# Altium PCB 主板.pcbdoc
Units mil, origin at the board's own origin, x right, y up, seen from the top; angles counter-clockwise.
Board outline 5658.5 x 2535.72 mil, 2 copper layers (Top Layer, Bottom Layer); 63 components, 57 nets, 290 pads, 118 vias.
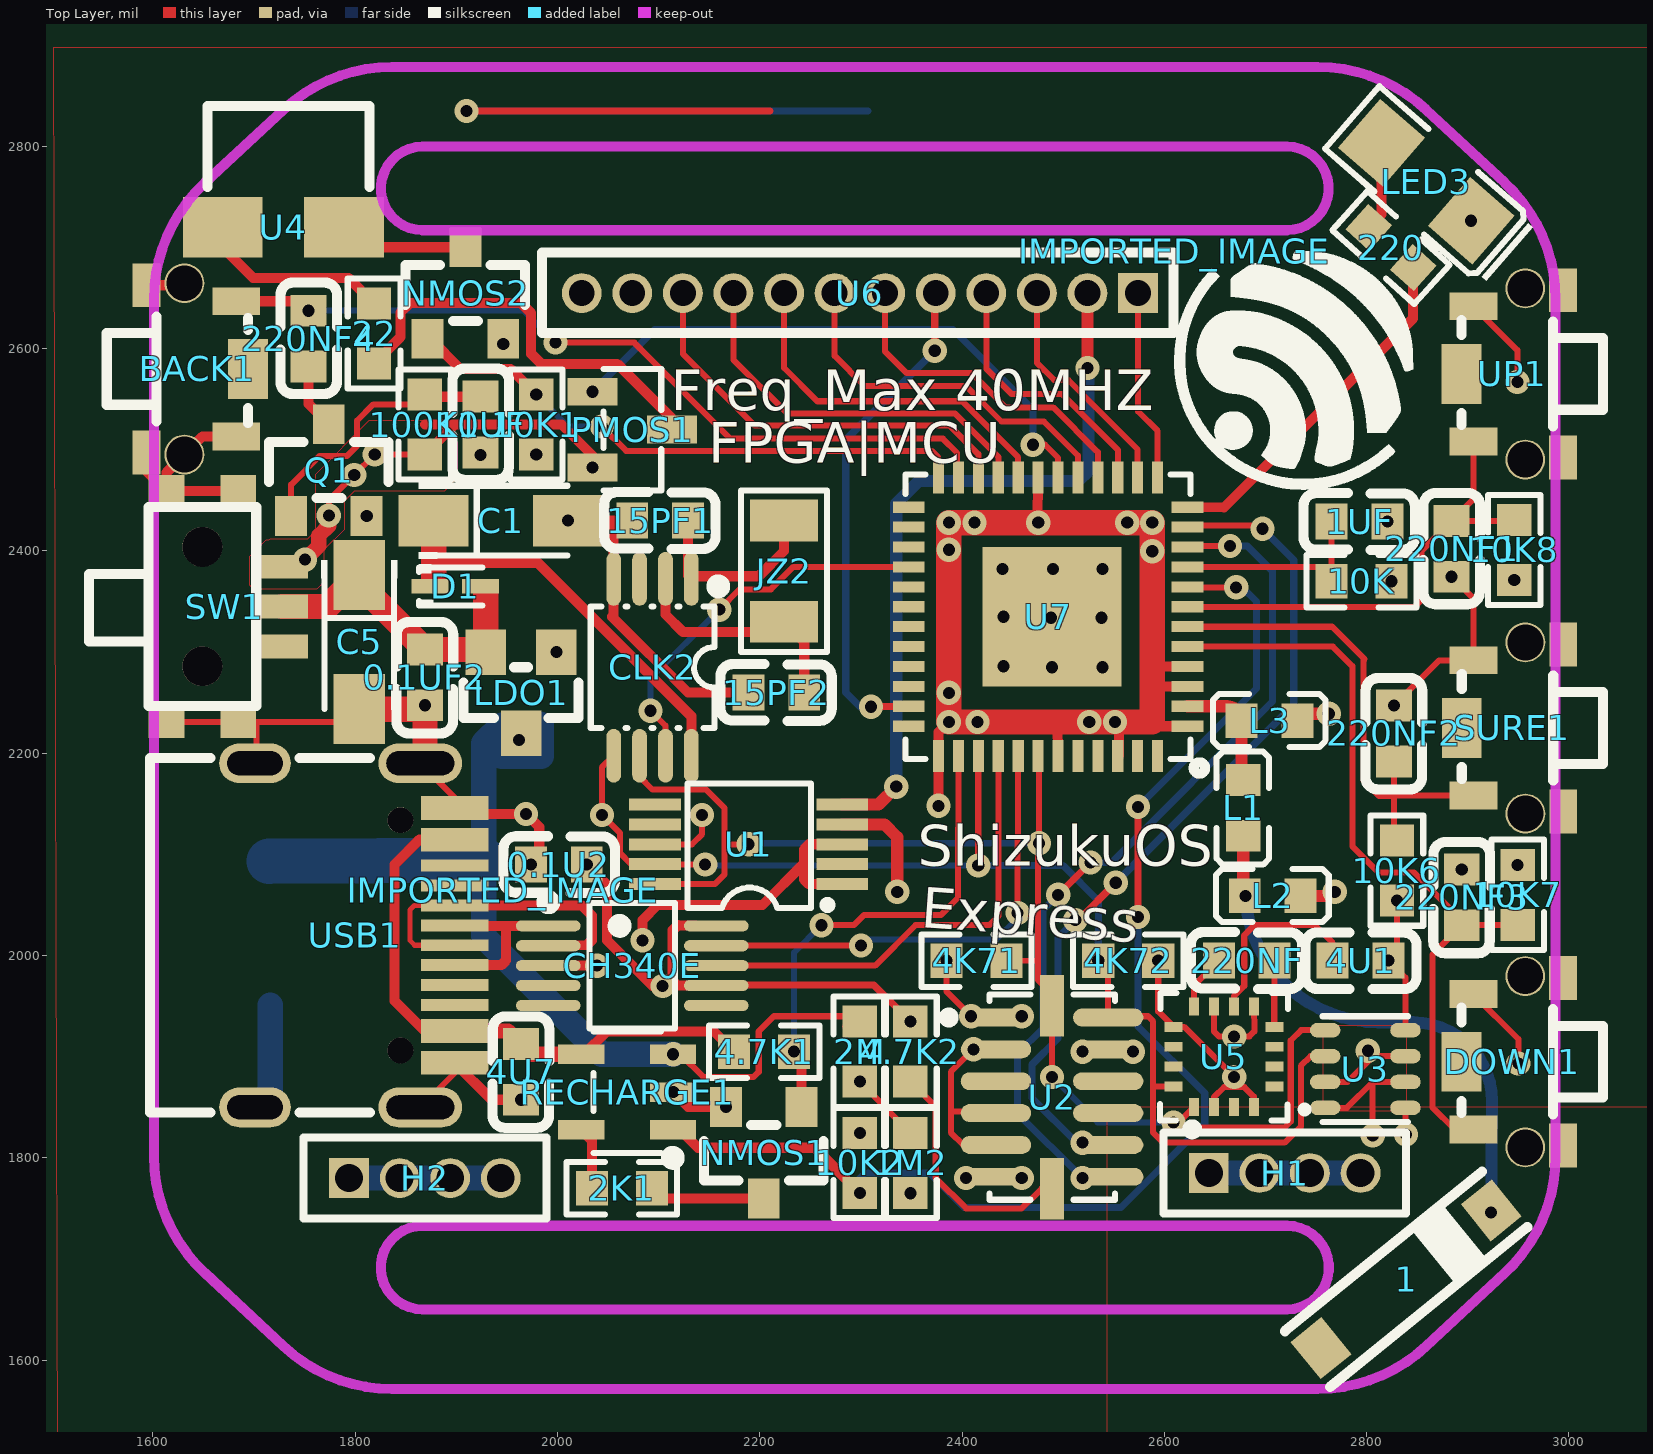
[diagram p0: Top Layer view]
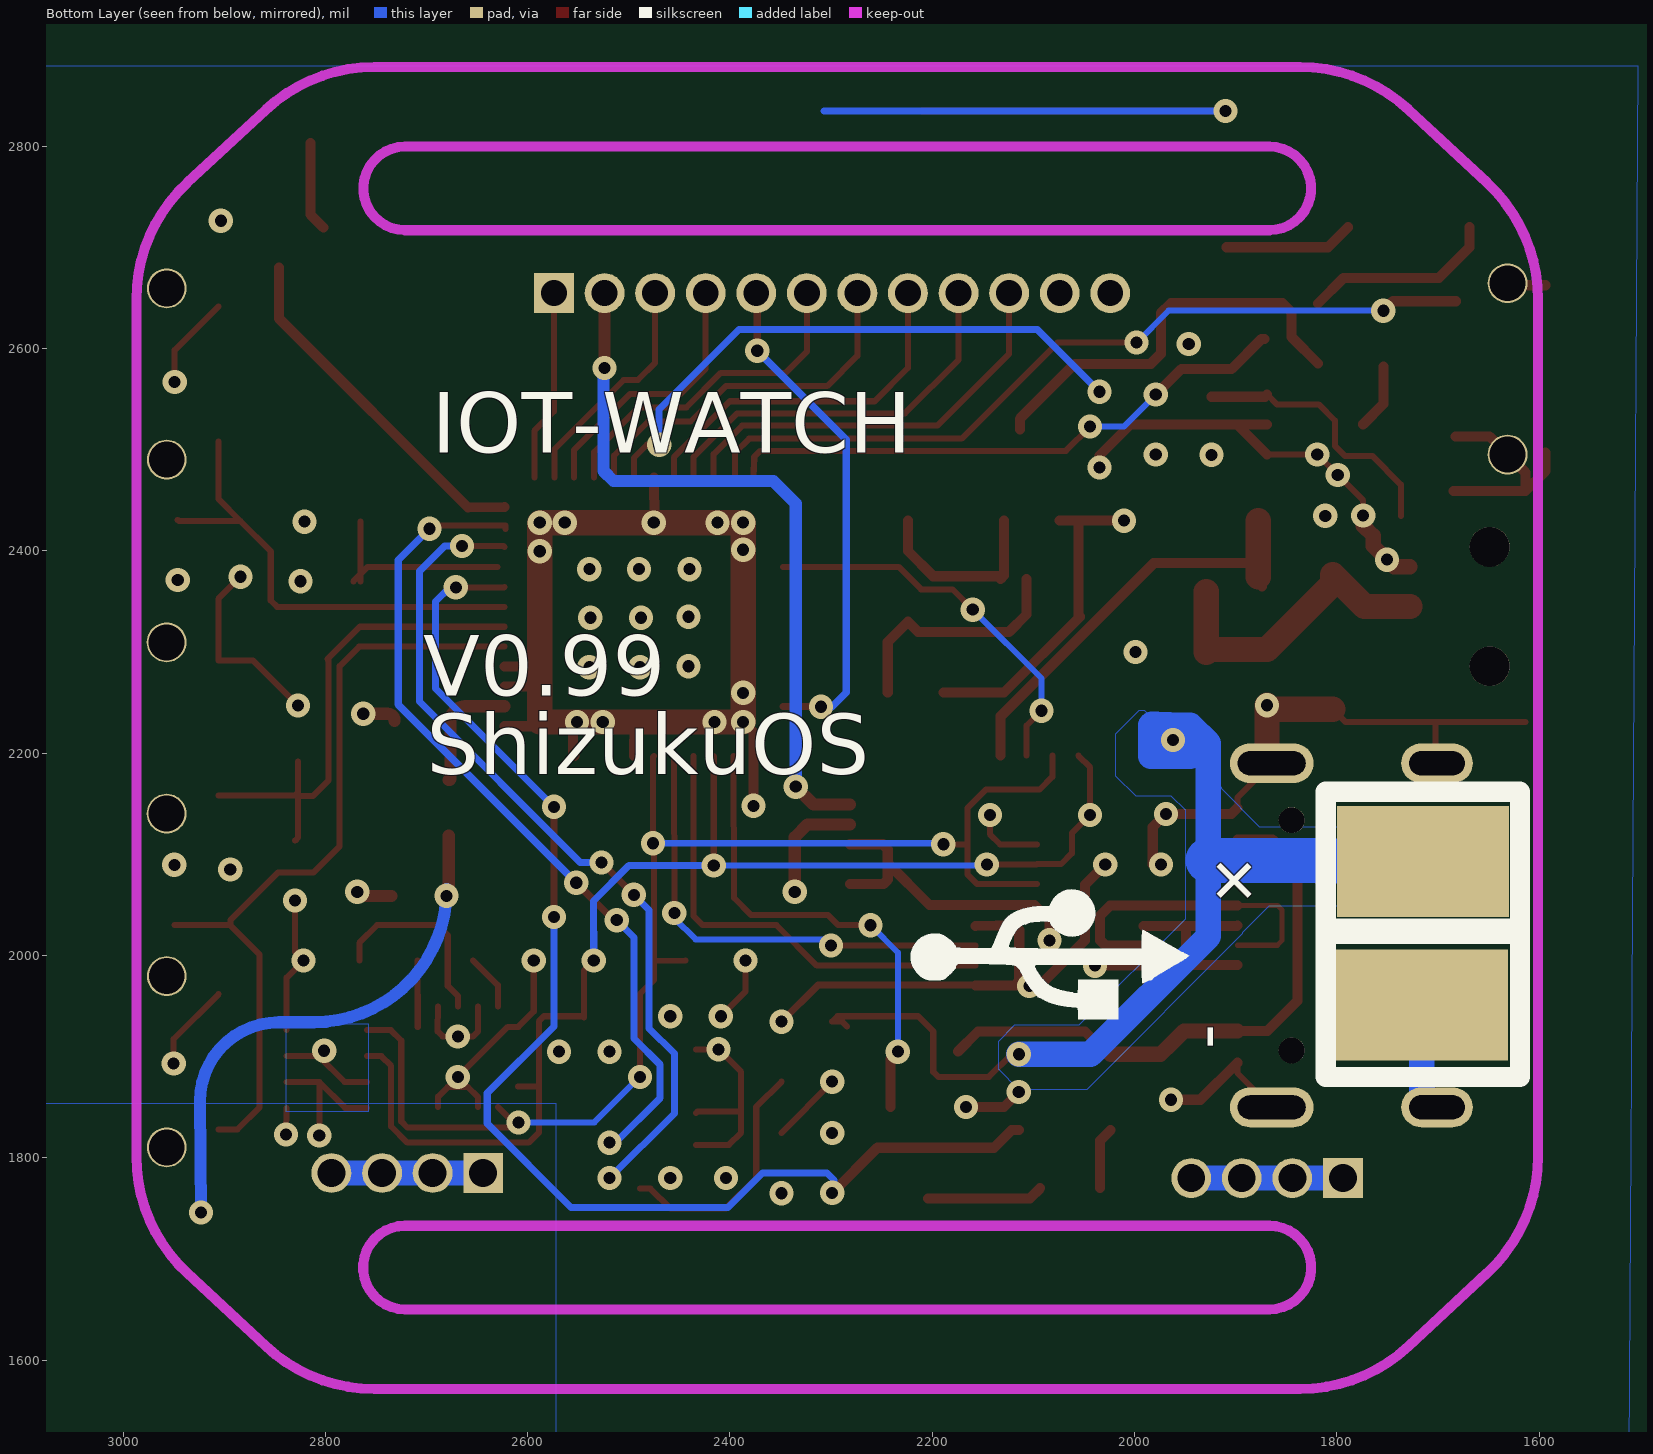
[diagram p1: Bottom Layer view, seen from below]

## Layer stack, top to bottom
Top Layer: signal copper (thickness not stored)
Dielectric: dielectric 12.6, FR-4, Dk 4.8
Bottom Layer: signal copper (thickness not stored)

## Board outline
6658.5,1000 1000,1000 1000,3535.72 6658.5,3535.72

## Components (designator, comment, footprint, x,y, rotation, side; value= is the part's Value field where it differs from the comment)
0.1U2 "0.1u" C0603 2001.45,2090 r180 top
0.1UF2 "0.1u" C0603 1869,2275 r90 top
1 "OA-C09" OA-C09 2839,1680 r219 top
1M2 "1M" R0603 2349,1795 r90 top
1UF "1uF" C0603 2793,2429 r0 top
2K1 "2k1" R0603 2063.65,1770 r0 top
2M "1M" R0603 2299,1905 r90 top
4.7K1 "4.7K" R0603 2204.34,1905 r0 top
4.7K2 "4.7K" R0603 2349,1905 r90 top
4K71 "4K71" R0603 2414.34,1995 r180 top
4K72 "4K72" R0603 2564.34,1995 r0 top
4U1 "0.1u" C0603 2794,1995 r180 top
4U7 "4.7uf" C0603 1964,1885 r90 top
10K "10kΩ" R0603 2795,2370 r0 top
10K1 "10K1" R0603 1979,2525 r90 top
10K2 "10K1" R0603 2299,1795 r90 top
10K6 "10K1" R0603 2830,2084 r270 top
10K7 "10K1" R0603 2949.34,2060 r90 top
10K8 "10K1" R0603 2946,2401 r270 top
10UF "0.1u" C0603 1924,2525 r270 top
15PF1 "15PF" C0603 2101.55,2430 r0 top
15PF2 "15PF2" C0603 2216.44,2260 r0 top
22 "1001" R0603 1818.66,2615 r90 top
100K1 "1k" R0603 1869,2525 r90 top
220 "10K2" R0603 2824,2700 r318 top
220NF "0.1u" C0603 2681.44,1995 r0 top
220NF1 "0.1u" C0603 2884,2402 r270 top
220NF2 "0.1u" C0603 2827,2219.55 r90 top
220NF3 "0.1u" C0603 2894,2057.55 r90 top
220NF4 "0.1u" C0603 1754,2610 r270 top
BACK1 "TS-1086EV-AR03526" SW-SMD_TS-1086EV-AR03526 1644,2580 r270 top
C1 "10uF" CAP-SMD_L3.2-W1.6-RD-C7171 1944,2430 r0 top
C5 "10uf1" CAP-SMD_L3.2-W1.6-RD-C7171 1804,2310 r270 top
CH340E "CH340E" MSOP-10_L3.0-W3.0-P0.50-LS5.0-BL 2074,1990 r270 top
CLK2 "PCF8563TS/5,118" TSSOP-8_L3.0-W3.0-P0.65-LS4.9-BL 2094,2285 r180 top
D1 "RB521S-30_C699098" SOD-523_L1.2-W0.8-LS1.6-RD 1899,2365 r0 top
DOWN1 "TS-1086EV-AR03526" SW-SMD_TS-1086EV-AR03526 2944,1895 r90 top
H1 "1.27mm1*4P" 1.27MM1*4P 2719,1785 r0 top
H2 "1.27mm1*4P" 1.27MM1*4P 1869,1780 r0 top
IMPORTED_IMAGE "IMPORTED_IMAGE" IMPORTED_IMAGE 1946.16,2064.79 r0 top
IMPORTED_IMAGE "IMPORTED_IMAGE" IMPORTED_IMAGE 2609.94,2696.36 r0 top
JZ2 "32.768K-SMD3215-2P" CRYSTAL-SMD_L3.2-W1.5-2 2224,2380 r90 top
L1 "1m" L0603 2678,2146 r90 top
L2 "1m" L0603 2707,2059 r0 top
L3 "1m" L0603 2704,2232 r0 top
LDO1 "XC6206P332MR-G" SEEED-SOT-23 1964,2260 r180 top
LED3 "25-21/T1D-AP2R1HY/2A" LED1206-R-RD 2859,2765 r139 top
NMOS1 "2N7002" SOT-23_L2.9-W1.3-P0.95-LS2.4-BR 2204,1805 r90 top
NMOS2 "2N7002" SOT-23_L2.9-W1.3-P0.95-LS2.4-BR 1909,2655 r270 top
PMOS1 "SI2305" SOT-23-3_L2.9-W1.3-P1.90-LS2.4-BR 2074,2520 r180 top
Q1 "2N7002" SOT-23_L2.9-W1.3-P0.95-LS2.4-BR 1773.96,2480 r270 top
RECHARGE1 "XT4054K421MR-G" SOT-23-5_L3.0-W1.7-P0.95-LS2.8-BL 2069,1865 r90 top
SURE1 "TS-1086EV-AR03526" SW-SMD_TS-1086EV-AR03526 2944.2,2224.99 r90 top
SW1 "MSK-12C00 COPY" MSK-12C00 1649,2345 r270 top
U1 "ADS1115BQDGSRQ1" VSSOP-10_L3.0-W3.0-P0.50-LS4.9-BL 2189,2110 r90 top
U2 "ADXL345BCCZ-RL7" LGA-14_L5.0-W3.0-P0.80-BL 2489,1860 r270 top
U3 "BMP280" SENSOR-TH_BMP280-BL 2798.7,1887.79 r0 top
U4 "rmt发射" RMT发射 1729,2720 r0 top
U5 "HMC5883L-TR" LGA-16_L3.0-W3.0-P0.50-BL_SQ 2659,1900 r0 top
U6 "1.27mm 12pin" "1.27MM 12P" 2299,2655 r180 top
U7 "ESP32-PICO-D4_REMAKE" "ESP32 PICOD4" 2485.07,2335 r90 top
UP1 "PinUP" SW-SMD_TS-1086EV-AR03526 2944,2575 r90 top
USB1 "TYPE-C16PIN REMAKE" USB-C-SMD_TYPE-C16PIN 1794,2020 r270 top

## Footprints (in the part's own frame and the unit in brackets; to place one, negate y for a bottom-side part, rotate by r counter-clockwise, add the part's x,y. Pads: shape width x height; smd on the part's side, far side on the other; paste and mask are expansions set on the pad)
1.27MM1*4P [mm]
  rect 1x1 hole 0.7: 1(-1.905,0)
  round 1 hole 0.7: 2(-0.635,0) 3(0.635,0) 4(1.905,0)
  silkscreen extent -3.05,-1.02 3.05,1.02
"1.27MM 12P" [mm]
  rect 1x1 hole 0.65: 1(-6.985,0)
  round 1 hole 0.65: 2(-5.715,0) 3(-4.445,0) 4(-3.175,0) 5(-1.905,0) 6(-0.635,0) 7(0.635,0) 8(1.905,0) 9(3.175,0) 10(4.445,0) 11(5.715,0) 12(6.985,0)
  silkscreen extent -7.87,-1.02 7.98,1
C0603 [mm]
  rect 0.8x0.9 smd: 1(-0.7,0) 2(0.7,0)
  silkscreen extent -1.41,-0.71 1.39,0.72
CAP-SMD_L3.2-W1.6-RD-C7171 [mil]
  rect 69.19x51.02 smd: 1(-66.39,0) 2(66.39,0)
  silkscreen extent -81,-37 66,37
CRYSTAL-SMD_L3.2-W1.5-2 [mm]
  rect 1.05x1.7 smd: 1(-1.27,0) 2(1.27,0)
  silkscreen extent -2.03,-1.08 2.03,1.08
"ESP32 PICOD4" [mm]
  rect 0.28x0.8 smd: 1(-2.75,-3.5) 2(-2.25,-3.5) 3(-1.75,-3.5) 4(-1.25,-3.5) 5(-0.75,-3.5) 6(-0.25,-3.5) 7(0.25,-3.5) 8(0.75,-3.5) 9(1.25,-3.5) 10(1.75,-3.5) 11(2.25,-3.5) 12(2.75,-3.5) 25(2.75,3.5) 26(2.25,3.5) 27(1.75,3.5) 28(1.25,3.5) 29(0.75,3.5) 30(0.25,3.5) 31(-0.25,3.5) 32(-0.75,3.5) 33(-1.25,3.5) 34(-1.75,3.5) 35(-2.25,3.5) 36(-2.75,3.5)
  rect 0.8x0.28 smd: 13(3.5,-2.75) 14(3.5,-2.25) 15(3.5,-1.75) 16(3.5,-1.25) 17(3.5,-0.75) 18(3.5,-0.25) 19(3.5,0.25) 20(3.5,0.75) 21(3.5,1.25) 22(3.5,1.75) 23(3.5,2.25) 24(3.5,2.75) 37(-3.5,2.75) 38(-3.5,2.25) 39(-3.5,1.75) 40(-3.5,1.25) 41(-3.5,0.75) 42(-3.5,0.25) 43(-3.5,-0.25) 44(-3.5,-0.75) 45(-3.5,-1.25) 46(-3.5,-1.75) 47(-3.5,-2.25) 48(-3.5,-2.75)
  rect 3.5x3.5 smd: 49(0,-0.1)
  silkscreen extent -3.94,-3.94 3.58,3.58
IMPORTED_IMAGE [mil]
L0603 [mm]
  rect 0.8x0.864 smd: 1(-0.7,0) 2(0.7,0)
  silkscreen extent -1.42,-0.65 1.41,0.67
LED1206-R-RD [mm]
  rect 1.485x1.62 smd: 1(1.493,0) 2(-1.492,0)
  silkscreen extent -2.77,-1.04 2.46,1.04
LGA-14_L5.0-W3.0-P0.80-BL [mm]
  oval 0.448x1.769 smd: 1(-2,-1.409) 2(-1.2,-1.409) 3(-0.4,-1.409) 4(0.4,-1.409) 5(1.2,-1.409) 6(2,-1.409) 8(2,1.409) 9(1.2,1.409) 10(0.4,1.409) 11(-0.4,1.409) 12(-1.2,1.409) 13(-2,1.409)
  rect 1.545x0.6 smd: 7(2.298,0) 14(-2.298,0)
  silkscreen extent -2.58,-2.72 2.58,1.58
LGA-16_L3.0-W3.0-P0.50-BL_SQ [mm]
  rect 0.25x0.45 smd: 1(-0.75,-1.263) 2(-0.25,-1.263) 3(0.25,-1.263) 4(0.75,-1.263) 9(0.75,1.263) 10(0.25,1.263) 11(-0.25,1.263) 12(-0.75,1.263)
  rect 0.45x0.25 smd: 5(1.263,-0.75) 6(1.263,-0.25) 7(1.263,0.25) 8(1.263,0.75) 13(-1.263,0.75) 14(-1.263,0.25) 15(-1.263,-0.25) 16(-1.263,-0.75)
  silkscreen extent -1.61,-1.95 1.61,1.6
MSK-12C00 [mm]
  rect 0.6x1.3 smd: 1(-1,2) 2(0,2) 3(1,2)
  rect 0.8x0.9 smd: 4(-2.9,-0.9) 4(-2.9,0.9) 4(2.9,-0.9) 4(2.9,0.9)
  round 1 hole 1 unplated: ""(-1.5,0) ""(1.5,0)
  silkscreen extent -2.5,-2.85 2.5,1.35
MSOP-10_L3.0-W3.0-P0.50-LS5.0-BL [mm]
  oval 0.28x1.62 smd: 1(-1,-2.11) 2(-0.5,-2.11) 3(0,-2.11) 4(0.5,-2.11) 5(1,-2.11) 6(1,2.11) 7(0.5,2.11) 8(0,2.11) 9(-0.5,2.11) 10(-1,2.11)
  silkscreen extent -1.74,-2.26 1.58,1.07
OA-C09 [mm]
  rect 1x1.2 smd: 1(-2.75,0) ""(2.75,0)
  silkscreen extent -3.19,-0.9 3.19,0.9
R0603 [mil]
  rect 31.75x34.02 smd: 1(-29.65,0) 2(29.65,0)
  silkscreen extent -55,-26 55,26
RMT发射 [mil]
  rect 78.74x60 smd: 1(60,0) 2(-60,0)
  silkscreen extent -75,40 85,120
SEEED-SOT-23 [mil]
  rect 40x45 smd: 1(-35,-40) 2(35,-40) 3(0,40)
  silkscreen extent -57,-25 57,25
SENSOR-TH_BMP280-BL [mm]
  oval 0.767x0.364 smd: 1(-1.008,-0.975) 2(-1.008,-0.325) 3(-1.008,0.325) 4(-1.008,0.975) 5(1.009,0.975) 6(1.009,0.325) 7(1.009,-0.325) 8(1.009,-0.975)
  silkscreen extent -1.61,-1.33 1.08,1.33
SOD-523_L1.2-W0.8-LS1.6-RD [mm]
  rect 0.93x0.36 smd: 1(-0.635,0) 2(0.635,0)
  silkscreen extent -0.91,-0.55 0.68,0.55
SOT-23-3_L2.9-W1.3-P1.90-LS2.4-BR [mm]
  rect 1.25x0.7 smd: 1(1,-0.95) 2(1,0.95) 3(-1,0)
  silkscreen extent -0.73,-1.53 0.73,1.53
SOT-23-5_L3.0-W1.7-P0.95-LS2.8-BL [mm]
  rect 0.49x1.157 smd: 1(-0.95,-1.154) 2(0,-1.154) 3(0.95,-1.154)
  rect 0.49x1.175 smd: 4(0.95,1.154) 5(-0.95,1.154)
  silkscreen extent -1.8,-1.29 1.53,0.85
SOT-23_L2.9-W1.3-P0.95-LS2.4-BR [mm]
  rect 1x0.8 smd: 1(1.15,-0.95) 2(1.15,0.95) 3(-1.15,0)
  silkscreen extent -0.7,-1.5 0.7,1.5
SW-SMD_TS-1086EV-AR03526 [mm]
  rect 0.7x1.2 smd: 1(1.7,0.975) 2(-1.7,0.975)
  rect 1.5x1 smd: 3(0,1.275)
  round 1 hole 0.9: 4(-2.15,-0.325) 5(2.15,-0.325)
  rect 1.1x0.7 smd: 4(-2.1,-1.275) 5(2.1,-1.275)
  silkscreen extent -1.32,-2.28 1.35,1.28
TSSOP-8_L3.0-W3.0-P0.65-LS4.9-BL [mm]
  oval 0.37x1.35 smd: 1(-0.975,-2.22) 2(-0.325,-2.22) 3(0.325,-2.22) 4(0.975,-2.22) 5(0.975,2.22) 6(0.325,2.22) 7(-0.325,2.22) 8(-0.975,2.22)
  silkscreen extent -1.8,-2.18 1.55,1.52
USB-C-SMD_TYPE-C16PIN [mm]
  oval 1x2.1 hole 0.6 slot 1.7 at 90 deg: 1(-4.32,1.787) 2(4.32,1.787)
  oval 1x1.8 hole 0.6 slot 1.4 at 90 deg: 3(-4.32,-2.362) 4(4.32,-2.362)
  rect 0.6x1.7 smd: A1B12(-3.2,2.65) A4B9(-2.4,2.65) B1A12(3.2,2.65) B4A9(2.4,2.65)
  rect 0.3x1.7 smd: A5(-1.25,2.65) A6(-0.25,2.65) A7(0.25,2.65) A8(-1.75,2.65) B5(1.75,2.65) B6(0.75,2.65) B7(-0.75,2.65) B8(1.25,2.65)
  round 0.65 hole 0.65 unplated: ""(-2.89,1.288) ""(2.89,1.288)
  silkscreen extent -4.45,-5 4.45,0.52
VSSOP-10_L3.0-W3.0-P0.50-LS4.9-BL [mm]
  rect 0.3x1.3 smd: 1(-1,-2.35) 2(-0.5,-2.35) 3(0,-2.35) 4(0.5,-2.35) 5(1,-2.35) 6(1,2.35) 7(0.5,2.35) 8(0,2.35) 9(-0.5,2.35) 10(-1,2.35)
  silkscreen extent -1.62,-2.08 1.52,1.54

## Free pads (board coordinates)
  rect 170x110 smd far side: 1(1715,2093) 1(1716,1951)

## Via types
v1: diameter 24, hole 12, Top Layer to Bottom Layer, tented both sides, 118 vias

## Nets (pads, with @x,y where several pads share a name; then routed paths per layer and width w, separated by ;. In a path a pad name is that pad's centre, name@x,y a point inside that pad or via, vN(x,y) a via of type N, cw(c..) or ccw(c..) an arc to the next point about the centre after c; other vN are vias at no path point)
1_1: 1.1 L1.1 L2.1 | length 534.5
  Top Layer w12: L1.1 2678,2059 L2.1
  Bottom Layer w12: v1@2680,2065.54 ccw(c2811.54,2065.54) 2811.54,1934 2842.44,1934 2846,1934 cw(c2846,1856) 2924,1856 v1(2923,1746)
  other v1: 2680.16,2059.03
2K1_2: 2K1.2 NMOS1.3 | length 115
  Top Layer w10: 2K1.2 2103.6,1759.7 NMOS1.3
3V3: C1.1 CLK2.8 D1.1 | length 478.8
  Top Layer w10: D1.1 1877.6,2368.6 C1.1 ; 1877.6,2388 1981,2388 2132.4,2236.6 CLK2.8
  Top Layer w25: 1877.6,2374.2 C1.1
4.7K2_1: 4.7K2.1 U2.7 | length 241.2
  Top Layer w6: 4.7K2.1 2374,1850.3 2374,1780 2404,1750 2459,1750 2478.6,1769.6 U2.7@2489,1769.6
4U1_2: 4U1.2 U5.10 | length 190.9
  Top Layer w6: U5.10 2668.8,1959.8 2679,1970 2679,2020 2689,2030 2749,2030 2766.4,2012.6 4U1.2
15PF1_2: 15PF1.2 CLK2.1 JZ2.2 | length 192
  Top Layer w10: 15PF1.2 2129.1,2375.7 CLK2.1 2135,2375 2199,2375 2224,2400 JZ2.2
15PF2_2: 15PF2.2 CLK2.2 JZ2.1 | length 242
  Top Layer w10: CLK2.2 2106.8,2337.2 2124,2320 2214,2320 JZ2.1 2244,2310 15PF2.2
220_1: 220.1 LED3.1 | length 89
  Top Layer w10: 220.1 2814.7,2732.5 LED3.1@2814.7,2803.5
220NF4_2: 220NF4.2 Q1.3 | length 65.4
  Top Layer w10: 220NF4.2 1754,2545.3 Q1.3
220NF_1: 220NF.1 U5.12 | length 55.4
  Top Layer w6: U5.12 2629.5,1970.6 220NF.1
220NF_2: 220NF.2 U5.8 | length 65.5
  Top Layer w6: U5.8 220NF.2
+5V: 4.7K1.1 4U7.2 RECHARGE1.4 USB1.A4B9 USB1.B4A9 | length 579.6
  Top Layer w10: USB1.B4A9 1868.5,1925.5 1839,1955 1839,2090 1863.5,2114.5 USB1.A4B9 ; RECHARGE1.4 2026.4,1902.4 2049,1925 2154.7,1925 4.7K1.1
  Top Layer w15: USB1.B4A9 1951,1925.5 4U7.2 1974.2,1902.4 RECHARGE1.4
ADC: U1.5 U6.2 | length 720.5
  Top Layer w12: U1.5 2317.4,2149.4 v1(2335,2167) ; v1(2524,2581) U6.2
  Bottom Layer w12: v1(2335,2167) 2335,2447 2357,2469 2515,2469 2525,2479 2525,2580 v1(2524,2581)
ASDFASDF: 
C5_1: 0.1UF2.2 C5.1 D1.2 LDO1.2 SW1.2 | length 629.3
  Top Layer w10: SW1.2 1772.6,2345 C5.1 1804,2367.6 0.1UF2.2 1926.4,2302.6 LDO1.2 1929,2360 D1.2
  Top Layer w25: SW1.2 1772.6,2345 C5.1 1804,2367.6 0.1UF2.2 1926.4,2302.6 LDO1.2 D1.2@1929,2360
CELL: 2M.2 LDO1.3 pad.1@1715,2093 RECHARGE1.3 | length 1222.3
  Top Layer w6: v1(2114.4,1902.4) 2121.6,1902.4 2144,1880 2194,1880 2199,1885 2199,1925 2214,1940 2293.7,1940 2M.2 ; 2M.2@2284.34,1930 2289,1934.66 2M.2
  Bottom Layer w25: v1(2114.4,1902.4) 2043.6,1902.4 1927,2019 1927,2094 1927,2210 1945,2228 ; 1943,2199 1948,2199 v1(1962,2213) ; 1943,2199 1943,2226 1945,2228 ; 1943,2199 1945,2197 1984,2197 ; 1945,2228 1983,2229 ; 1945,2228 1976,2197 1984,2197 ; 1945,2228 1960,2213 v1(1962,2213) ; v1(1962,2213) 1978,2229 1983,2229 ; v1(1962,2213) 1967,2213 1983,2229 ; 1983,2229 1984,2228 1984,2197
  Bottom Layer w45: pad.1@1715,2093 1927,2094
CELLADC: 1M2.2 2M.1 U1.4 | length 387.9
  Top Layer w6: v1(2299,1875.3) 1M2.2
  Top Layer w12: U1.4 2323.3,2129.7 2336,2117 v1(2336,2063)
  Mid-Layer 1 w12: v1(2299,1875.3) 2299,1930 2336,1967 v1(2336,2063)
CLKOUT: CLK2.7 U7.28 | length 383.5
  Top Layer w6: v1(2092,2242) 2106.8,2227.2 CLK2.7 ; v1(2160,2342) 2180,2362 2211,2362 2233.2,2384.2 U7.28
  Bottom Layer w6: v1(2092,2242) 2092,2274 v1(2160,2342)
CS: U6.6 U7.16 | length 334.3
  Top Layer w6: U6.6 2324,2597 2345,2576 2409,2576 2443,2542 2490,2542 2534.3,2497.7 U7.16
D+: CH340E.1 USB1.A6 USB1.B6 | length 180.5
  Top Layer w10: USB1.B6 1944.5,1990.5 1949,1995 1949,2027.5 1947.1,2029.4 ; USB1.A6 1898.8,2029.4 CH340E.1
D-: CH340E.2 USB1.A7 USB1.B7 | length 331.7
  Top Layer w5: USB1.A7 1858.8,2010.2 1854,2015 1854,2045 1858.5,2049.5 USB1.B7
  Top Layer w10: USB1.B7 2024,2049.5 2034,2039.5 2034,2015 2029.6,2010.6 CH340E.2
D/C: U6.7 U7.17 | length 365
  Top Layer w6: U6.7 2274,2593 2304,2563 2404,2563 2439,2528 2481,2528 2514.6,2494.4 U7.17
EN: 1UF.1 10K.1 U7.9 | length 207.3
  Top Layer w6: U7.9@2629.9,2384.2 2758.1,2384.2 10K.1@2772.3,2370 ; 10K.1 2765.3,2428.9 1UF.1
GND: 0.1U2.2 0.1UF2.1 1M2.1 1UF.2 4U1.1 4U7.1 10K1.1 10K6.2 10K7.2 10K8.2 10UF.2 15PF1.1 15PF2.1 BACK1.1 BACK1.5 C1.2 C5.2 CH340E.3 CLK2.4 L2.2 L3.2 LDO1.1 LED3.2 NMOS1.2 NMOS2.2 pad.1@1716,1951 Q1.2 RECHARGE1.2 SW1.4 U1.1 U1.3 U2.2 U2.4 U2.5 U2.12 U3.1 U3.5 U3.7 U5.9 U5.11 U6.12 U7.49 USB1.1 USB1.2 USB1.3 USB1.4 USB1.A1B12 USB1.B1A12 | length 8677.3
  Top Layer w6: SW1.4@1613.6,2230.8 1791.2,2230.8 C5.2 ; USB1.3 1702.3,2191.4 1702.3,2230.8 ; USB1.2 1898.3,1883.9 USB1.B1A12 ; USB1.1 1898.3,2156.1 USB1.A1B12 ; 2389,1845.9 2431.9,1845.9 U2.4 ; v1(2411.24,1907.24) 2389,1885 2389,1825 2401.2,1812.8 U2.5 ; v1(2411.24,1907.24) U2.2 ; U5.11 2649,1925 2654,1920 v1(2669,1920) 2684,1920 2689,1925 U5.9 ; U3.1 2780.4,1849.4 2806,1875 ; v1(2806,1822) 2806,1875 ; v1(2830,2054.34) 2830,2003.4 v1(2821.55,1995) 2838.4,1978.1 U3.5 ; U3.7 2806,1875
  Top Layer w7: v1(1910,2835) 2210,2835
  Top Layer w10: BACK1.5@1593.8,2497.3 1593.8,2478.9 SW1.4@1613.6,2459.2 ; BACK1.1 1648.9,2513.1 1631.2,2495.3 1613.6,2477.7 SW1.4@1613.6,2459.2 ; SW1.4@1684.4,2459.2 SW1.4@1613.6,2459.2 ; USB1.B1A12 1934.9,1857.4 v1(1964,1857.45) ; USB1.A1B12 1904.3,2140 v1(1969,2140) 1982,2127 1982,2090 v1(1973.89,2090) ; CH340E.3 v1(2039,1990) ; v1(2010.39,2430) 15PF1.1 ; 2053.4,2430 2055.6,2427.8 CLK2.4 2055.6,2336.6 2054,2335 2129,2260 15PF2.1 ; v1(2084,2015) 2084,2035 2099,2050 2202.72,2050 2244,2091.28 ; v1(2114.42,1865) 2129.1,1850.3 v1(2166.6,1850.28) ; U1.1 2248.4,2070.6 2244,2075 2244,2105 2249,2110 U1.3
  Top Layer w12: L3.2 cw(c2738.55,2232) 2738.55,2239 v1(2762.56,2239) ; L2.2 2768.56,2059 v1(2768.56,2063)
  Top Layer w25: C5.2 1865.2,2243.6 v1(1869,2247.44) 1869,2194.7 USB1.1
  Mid-Layer 1 w6: BACK1.5@1631.2,2495.35 1750.77,2495.35 v1(1811.4,2434.72) 1871.68,2495 v1(1924,2495) ; USB1.4 USB1.2 1898.9,1849.9 v1(2039,1990) ; USB1.1 1864.4,2242.8 v1(1869,2247.44) ; v1(1869,2247.44) 1946.44,2247.44 v1(1999,2300) 1999,2418.61 v1(2010.39,2430) 2010.39,2463.96 v1@1979,2495.35 ; v1(1973.89,2090) 2039,2024.89 v1(2039,1990) ; v1@1979,2495.3 v1(1924,2495) ; U6.12 1996.68,2655 v1(1946.4,2604.72) 1924,2582.32 v1(1924,2495) ; v1(2084,2015) 2064,2015 v1(2039,1990) ; v1(2114.42,1865) 2039,1940.42 v1(2039,1990) ; v1(2166.6,1850.28) 2219.9,1797 2349,1797 v1(2349,1765) 2349,1845 v1(2411.24,1907.24) 2516.76,1907.24 v1(2519,1905) ; v1(2539,2285) 2585,2239 v1(2762.56,2239) ; v1(2569,1905) 2584,1920 v1(2669,1920) 2767,1822 v1(2806,1822) 2806,1834 2768,1872 2768,1941.45 v1(2821.55,1995) ; 2762.56,2430.34 2819.22,2430.34 v1(2820.56,2429) 2908,2429 2946,2391 v1(2946,2371.34) ; v1@2903.35,2726.45 2762.56,2585.67 v1(2762.56,2239) ; v1(2949.34,2089.66) 2922.68,2063 v1(2768.56,2063) 2768.56,2233 v1(2762.56,2239)
  Mid-Layer 1 w7: v1(1910,2835) 1805,2835 1743,2773 1743,2754 1842,2655 U6.12
  Mid-Layer 1 w45: v1(2441,2335) 2442,2334 v1(2538,2334) ; v1(2489,2285) 2489,2381 v1(2490,2382) ; v1(2440,2382) 2537,2285 v1(2539,2285) ; v1(2440,2382) v1(2539,2382) ; v1(2440,2382) 2440,2287 v1(2441,2286) ; v1(2441,2286) 2443,2286 v1(2539,2382) ; v1(2441,2286) 2538,2286 v1(2539,2285) ; v1(2539,2285) v1(2539,2382)
  Bottom Layer w7: v1(1910,2835) 2307,2835
  Bottom Layer w25: USB1.4 1716,1864.9 pad.1@1716,1951
  other v1: 2488,2334 1979,2495.35 2903.35,2726.45
H1_1: H1.1 H1.2 H1.3 H1.4 | length 150
  Bottom Layer w25: H1.1 H1.4
H2_1: H2.1 H2.2 H2.3 H2.4 | length 150
  Bottom Layer w25: H2.1 H2.4
INT1: U2.8 U7.10 | length 838.1
  Top Layer w6: U7.10 2624,2405 v1(2665,2405)
  Top Layer w7: v1(2495,2060) v1(2527,2092)
  Bottom Layer w7: v1(2495,2060) 2480,2045 2480,2010 2480,1928 2455,1903 2455,1844 v1(2519,1780) ; v1(2527,2092) 2548,2092 2707,2251 2707,2380 2682,2405 v1(2665,2405)
INT2: U2.9 U7.11 | length 835.6
  Top Layer w6: U7.11@2621.9,2421.6 2621.9,2425 2696,2425 v1@2696,2420
  Top Layer w7: v1(2512,2035) 2515,2035 v1(2552,2072)
  Bottom Layer w7: v1(2512,2035) 2495,2018 2495,2014 2495,1918 2469,1892 2469,1859 2513,1815 v1(2519,1815) ; v1(2552,2072) 2728,2248 2728,2391 v1(2697,2422)
IO18: U6.5 U7.35 | length 500
  Top Layer w7: v1(2310,2246) U7.35 ; v1(2373,2598) 2373,2654 U6.5
  Bottom Layer w7: v1(2310,2246) 2299,2246 2285,2260 2285,2510 v1(2373,2598)
IO25: U6.3 U7.14 | length 231.6
  Top Layer w6: U6.3 2474,2586 2491,2569 2505,2569 2573.6,2500.3 U7.14
IO26: U6.4 U7.15 | length 265.3
  Top Layer w6: U6.4 2424,2580 2449,2555 2499,2555 2554,2500 U7.15
IO33: U6.1 U7.13 | length 190.2
  Top Layer w6: U6.1 2574,2538 2593.3,2518.7 U7.13
LEDEN: 220.2 U7.12 | length 350.8
  Top Layer w10: U7.12 2659,2443 2846,2630 220.2
MOSI: U6.9 U7.21 | length 387.9
  Top Layer w6: U6.9 2174,2589 2227,2536 2393,2536 2435.9,2493.1 U7.21
PINBACK: 220NF4.1 BACK1.2 U7.23 | length 799.5
  Top Layer w6: v1(1998,2606) 2076,2606 2171,2511 2381,2511 2395,2497 2395,2474.3 U7.23
  Top Layer w10: BACK1.2 1744.6,2646.9 v1(1754,2637.55)
  Bottom Layer w6: v1(1754,2637.55) 1966.45,2637.55 v1(1998,2606)
PINDOWN: 10K7.1 220NF3.1 DOWN1.2 U7.5 | length 844.7
  Top Layer w6: U7.5 2766.5,2305.5 2786,2286 2786,2108 2812,2082 2845,2082 2847,2082 2894,2035 220NF3.1 ; DOWN1.2 2886.9,1828.1 2865,1850 2865,2001 220NF3.1 ; 220NF3.1 10K7.1 220NF3.1
PINSURE: 10K6.1 220NF2.1 SURE1.2 U7.6 | length 504.8
  Top Layer w6: U7.6@2622.9,2325.1 2765.9,2325.1 2798,2293 2797,2292 2797,2173 2812.3,2157.7 2827,2157.7 ; 2827,2161.2 2830.2,2158.1 SURE1.2 ; 220NF2.1 2827,2116.7 10K6.1@2830,2113.6
PINUP: 10K8.1 220NF1.1 U7.7 UP1.2 | length 474.6
  Top Layer w6: U7.7 2847.8,2344.8 2854,2351 2854,2399.6 220NF1.1 ; UP1.2 2905.6,2451.2 220NF1.1 ; 10K8.1 2944.9,2429.6 220NF1.1
PMOS1_3: 22.1 PMOS1.3 | length 415.1
  Top Layer w10: 22.1 1844.7,2611.4 1844.7,2635.7 1854,2645 1964,2645 1974,2635 1974,2595 1984,2585 2059,2585 2113.4,2530.6 PMOS1.3
Q1_1: 10UF.1 100K1.2 Q1.1 | length 270.8
  Top Layer w6: Q1.1 1736.6,2465.6 1765,2494 1792,2494 1802,2504 1802,2529 1818,2545 1859.3,2545 100K1.2
  Top Layer w10: 100K1.2 1871.1,2552.5 10UF.1@1924,2552.5
RECHARGE1_5: 2K1.1 RECHARGE1.5 | length 61.9
  Top Layer w10: RECHARGE1.5 2034,1817.2 2K1.1
RECHARGE-EN: 4.7K1.2 NMOS1.1 U7.38 | length 480.3
  Top Layer w6: v1(2261,2030) 2293,2030 2303,2040 2379,2040 2396,2057 U7.38
  Top Layer w10: v1(2234,1905) 2241.4,1897.6 NMOS1.1
  Bottom Layer w6: v1(2234,1905) 2234,2003 v1(2261,2030)
RECHARGE-READ: 10K2.1 RECHARGE1.1 U7.8 | length 1284.2
  Top Layer w6: U7.8 2623.4,2364 v1(2671,2364)
  Top Layer w7: v1(2574,2038) v1(2574,2147)
  Top Layer w10: RECHARGE1.1 2121.4,1827.6 2139,1810 2254.3,1810 10K2.1
  Bottom Layer w7: v1(2299,1765.35) 2297,1767.35 2297,1778 2304,1785 2368,1785 2402,1751 2557,1751 2640,1834 2640,1864 2574,1930 v1(2574,2038) ; v1(2574,2147) 2691,2264 2691,2350 2677,2364 v1(2671,2364)
RES: U6.8 U7.20 | length 361.9
  Top Layer w6: U6.8 2224,2581 2257,2548 2400,2548 2455.5,2492.5 U7.20
RMTEN: PMOS1.1 U7.18 | length 578.2
  Top Layer w6: v1(2470,2505) 2482,2505 2494.9,2492.1 U7.18
  Bottom Layer w7: v1(2034.63,2557.4) 2096.23,2619 2391,2619 2470,2540 v1(2470,2505)
RMTOUT: 10K1.2 NMOS2.1 U7.24 | length 572.9
  Top Layer w6: v1(2044,2523) 2068,2499 2370,2499 2376,2493 U7.24
  Top Layer w10: NMOS2.1 1874.3,2609.7 1904,2580 1953.7,2580 v1(1979,2554.66)
  Bottom Layer w6: v1(1979,2554.66) 2010.66,2523 v1(2044,2523)
RXD0: CH340E.8 U7.40 | length 457.4
  Top Layer w6: CH340E.8 2314,1990 2354,2030 2427,2030 2435.9,2038.9 U7.40@2435.9,2197.2
S$1092: 
S$16300: 
SCL: 4K71.1 CLK2.6 U1.10 U2.14 U3.4 U5.1 U7.42 | length 1326.2
  Top Layer w6: CLK2.6 2081.2,2176.8 2094,2164 2147,2164 2165,2146 2165,2080 2155.6,2070.6 U1.10 ; 2165,2109.7 v1(2189,2110) ; 4K71.1 2475,1994.8 ; U7.42 2476,2196.4 v1(2476,2111) 2475,2110 2475,1976 2489,1962 U2.14 v1(2489,1880) ; U5.1 2614.2,1835 v1(2609,1835) 2614,1830 2639,1830 2719,1830 2725,1836 2725,1916 2735.2,1926.2 U3.4
  Bottom Layer w6: v1(2189,2110) 2190,2111 v1(2476,2111) ; v1(2489,1880) 2534,1835 v1(2609,1835)
SCLK: U6.10 U7.22 | length 416.3
  Top Layer w6: U6.10 2124,2595 2195,2524 2388,2524 2416.2,2495.8 U7.22
SDA: 4K72.1 CLK2.5 U1.9 U2.13 U3.3 U5.16 U7.39 | length 1251.2
  Top Layer w6: CLK2.5 2044,2186 v1(2044,2139) 2062,2121 2062,2101 2072.7,2090.3 U1.9 2096.8,2090 v1(2146,2090) ; v1(2416,2089) 2416,2197 U7.39 ; v1(2534.69,1995) 2544.5,1985.2 U2.13 2545.7,1940 2584,1940 2589,1935 2589,1880 2589,1825 2599,1815 2719,1815 2735,1831 2735,1891 2744.6,1900.6 U3.3 ; 2589,1870.5 2598.5,1870.5 U5.16
  Bottom Layer w6: v1(2146,2090) 2147,2089 v1(2416,2089)
  Bottom Layer w7: v1(2416,2089) 2500,2089 2535,2054 v1(2534.69,1995)
TXD0: CH340E.9 U7.41 | length 469.3
  Top Layer w6: CH340E.9 v1(2300,2010) ; v1(2455,2042) U7.41
  Bottom Layer w6: v1(2300,2010) 2306,2016 2420,2016 2434,2016 2455,2037 v1(2455,2042)
U4_1: NMOS2.3 U4.1 | length 128.2
  Top Layer w10: U4.1 1808.7,2700.3 NMOS2.3
U4_2: 22.2 U4.2 | length 192.6
  Top Layer w10: U4.2 1669,2700 1699,2670 1793.3,2670 22.2
U7_2: L1.2 L3.1 U7.2 | length 121.1
  Top Layer w12: U7.2 2662.03,2246.41 cw(c2662.03,2232) L3.1 2676.45,2175.11 ccw(c2678,2175.11) L1.2
VCC: 0.1U2.1 4.7K2.2 4K71.2 4K72.2 10K2.2 10K.2 100K1.1 220NF1.2 220NF2.2 220NF3.2 CH340E.7 CH340E.10 DOWN1.1 PMOS1.2 SURE1.1 SW1.1 U1.8 U2.1 U2.6 U3.2 U3.6 U3.8 U5.2 U5.4 U5.13 U6.11 U7.1 U7.3 U7.4 U7.19 U7.37 U7.43 U7.46 UP1.1 | length 5371.4
  Top Layer w6: v1(1774,2435) 1774,2450 v1(1799.15,2475.15) v1@1819.35,2495.35 ; v1@1819.3,2495.3 100K1.1 ; U1.8 2133,2110 2143,2120 v1(2143,2139) ; v1(2384.68,1995) 2384.7,1964.3 v1(2409,1940) ; v1(2594,1995) 2594,1944.8 U5.13 2619.5,1929.5 v1(2669,1880) v1@2669,1870 ; U5.2 2649.2,1860.2 2659,1870 2679,1870 2688.5,1860.5 U5.4 ; U3.2 2781,1875 v1@2806.6,1900.6 ; v1@2797,1910 v1@2806.6,1900.6 ; v1(2827,2247.11) 2871.8,2291.9 SURE1.1 2905.8,2352.6 v1(2884,2374.44) ; U3.8 v1(2839,1823) ; U3.6 v1@2806.6,1900.6 ; DOWN1.1 2950,1917.5 v1@2950,1890 ; UP1.1 2949,2598.6 v1(2949,2567)
  Top Layer w7: CH340E.7 2157.8,1971 2212,1971 2312.7,1971 v1(2349,1934.66)
  Top Layer w10: 100K1.1 1898.7,2525 2004,2525 2034.6,2494.4 v1(2034.63,2482.6) ; 1869,2525 1898.65,2525 ; v1(2029,2090) 2049,2070 2049,2015 2094,1970 v1(2104,1970) 2118.7,1970.3 ; CH340E.7 2118.7,1970.3 ; CH340E.10 2119,2030 2114,2025 2114,1975 2118.7,1970.3 ; v1(2376.8,2148) U7.37 2376.8,2220.8 v1(2387,2231) ; v1@2474.6,2428 U7.19 ; 2494.3,2231 U7.43 ; U7.46 2555.1,2197.2 v1@2555.1,2238 ; 2572,2231 2572,2226.7 U7.1 ; 2585,2268.9 2585,2266.1 U7.3 ; 2585,2285.9 U7.4
  Top Layer w15: SW1.1@1727.8,2384.4 1743.4,2384.4 v1(1750.43,2391.43) ; v1(1750.43,2391.43) 1764,2405 1764,2415 1774,2425 v1(1774,2435)
  Top Layer w25: v1(2387,2231) v1(2415.33,2231) v1(2525.83,2231) v1(2551.33,2231) 2588,2231 v1(2588,2399.73) v1(2588,2428) v1(2563.33,2428) v1(2475.33,2428) v1(2412.33,2428) v1(2387,2428) v1(2387,2401.23) v1(2387,2259.73) v1(2387,2231)
  Mid-Layer 2 w7: v1(2029,2090) 2094,2090 v1(2143,2139) 2143,2259 2034.63,2367.37 v1(2034.63,2482.6) 2074,2521.97 U6.11 ; v1(2404,1780) 2359.34,1824.66 v1(2299,1824.66) 2349,1874.66 v1(2349,1934.66) 2354.34,1940 v1(2409,1940) ; v1(2459,1940) 2539,1940 v1(2594,1995) ; v1(2669,1880) 2694.84,1905.84 v1(2801.25,1905.84) 2801.25,1860.75 v1(2839,1823) 2909.36,1893.36 v1(2950,1893.36) 2894,1949.36 v1(2894,2085.11) 2827,2152.11 v1(2827,2247.11) ; v1(2824.66,2370) 2829.1,2374.44 v1(2884,2374.44) 2884,2502 v1(2949,2567)
  Mid-Layer 2 w10: v1(2376.8,2148) 2376.8,2002.88 v1(2384.68,1995)
  other v1: 2459,1780 1819.35,2495.35
pads on no net: 1. BACK1.3 BACK1.4 CH340E.4 CH340E.5 CH340E.6 CLK2.3 DOWN1.3 DOWN1.4 DOWN1.5 SURE1.3 SURE1.4 SURE1.5 SW1. SW1.3 U1.2 U1.6 U1.7 U2.3 U2.10 U2.11 U5.3 U5.5 U5.6 U5.7 U5.14 U5.15 U7.25 U7.26 U7.27 U7.29 U7.30 U7.31 U7.32 U7.33 U7.34 U7.36 U7.44 U7.45 U7.47 U7.48 UP1.3 UP1.4 UP1.5 USB1. USB1.A5 USB1.A8 USB1.B5 USB1.B8
copper on no net: | length 38.2
  Top Layer w10: 1593.8,2662.7 1629.2,2662.7 1631.2,2664.7

## Polygon pours and split planes (outlines as drawn)
ASDFASDF on Bottom Layer (solid): 2839,1932 2839,1846 2757,1846 2757,1932 2839,1932
CELL on Bottom Layer (solid): 1787,2127 1876,2127 1914,2165 1914,2166 1990,2242 1996,2242 2019,2219 2019,2178 1999,2158 1964,2158 1950,2144 1950,2036 2055,1931 2119,1931 2135,1915 2135,1888 2115,1868 2047,1868 1893,2022 1893,2023 1867,2049 1768,2049 1767,2050
GND on Bottom Layer (solid): 1502,2879 3113,2879 3113,1854 2572,1854 2572,1504 1511,1504 1511,1505
ASDFASDF on Mid-Layer 2 (solid): 2841,1931 2841,1847 2757.02,1847 2758,1931 2841,1931
VCC on Mid-Layer 2 (solid): 1507,2898 3106,2898 3106,1854 2597,1854 2597,1505 1510,1505 1510,1568
VCC on Top Layer (solid): 1696,2395 1712,2411 1715,2411 1716,2412 1753,2412 1761,2420 1761,2476 1814,2529 1880,2529 1901,2508 1901,2472 1888,2459 1799,2459 1789,2449 1789,2421 1769,2401 1769,2369 1762,2362 1700,2362 1696,2366 1696,2382
ASDFASDF on Top Layer (solid): 2757,1931 2839,1931 2839,1846 2757,1846 2757,1848
GND on Top Layer (solid): 1502,2898 3110,2898 3110,1850 2543,1850 2543,1513 1506,1513 1506,1502
ASDFASDF on Mid-Layer 1 (solid): 2757,1931 2840,1931 2840,1849 2758,1849 2758,1848
GND on Mid-Layer 1 (solid): 1500,2892 3114,2892 3114,1842 2577,1842 2577,1500 1514,1500 1514,1505

## Keep-outs
Keep-Out Layer:
  lines w10: 1601.09,1801.45 ccw(c1758.57,1801.45) 1651.29,1686.16 ; 1601.09,2648.55 cw(c1758.57,2648.55) 1651.29,2763.84 ; 1729.21,1613.65 ccw(c1836.49,1728.94) 1836.49,1571.46 ; 1729.21,2836.35 cw(c1836.49,2721.06) 1836.49,2878.54 ; 1866.84,1650.2 cw(c1866.63,1691.54) 1866.84,1732.88 ; 1866.84,2717.12 cw(c1866.84,2758.46) 1866.84,2799.8 ; 2721.16,1650.2 ccw(c2721.37,1691.54) 2721.16,1732.88 ; 2721.16,2717.12 ccw(c2721.16,2758.46) 2721.16,2799.8 ; 2751.51,1571.46 ccw(c2751.51,1728.94) 2858.79,1613.65 ; 2751.51,2878.54 cw(c2751.51,2721.06) 2858.79,2836.35 ; 2936.71,1686.16 ccw(c2829.43,1801.45) 2986.91,1801.45 ; 2936.71,2763.84 cw(c2829.43,2648.55) 2986.91,2648.55

## Silkscreen, mask and mechanical layers (free items; w line width, h text height)
Top Overlay:
  text "Freq_Max 40MHZ" at 2112,2539 h40
  text "FPGA|MCU" at 2149,2487 h40
  text "ShizukuOS" at 2356,2089 h40
  text "Express" at 2358.6,2028.05 h40 r356
Bottom Overlay:
  lines w20: 1619,1880 1811,1880 1811,2162 1619,2162 1619,1880
  lines w25 net S$16300: 1626,2024 1804,2024
  text "IOT-WATCH" at 2695,2497 h60
  text "V0.99" at 2703,2257 h60
  text "ShizukuOS" at 2700,2179 h60
  text "+" at 1906.32,2038.32 h50 r315
  text "-" at 1944,1932 h50 r90
Top Solder:
  text "CONQUER" at 1932,2787 h50